# EAGLE board board_slave_3_LVDT (EAGLE 9.6.2)
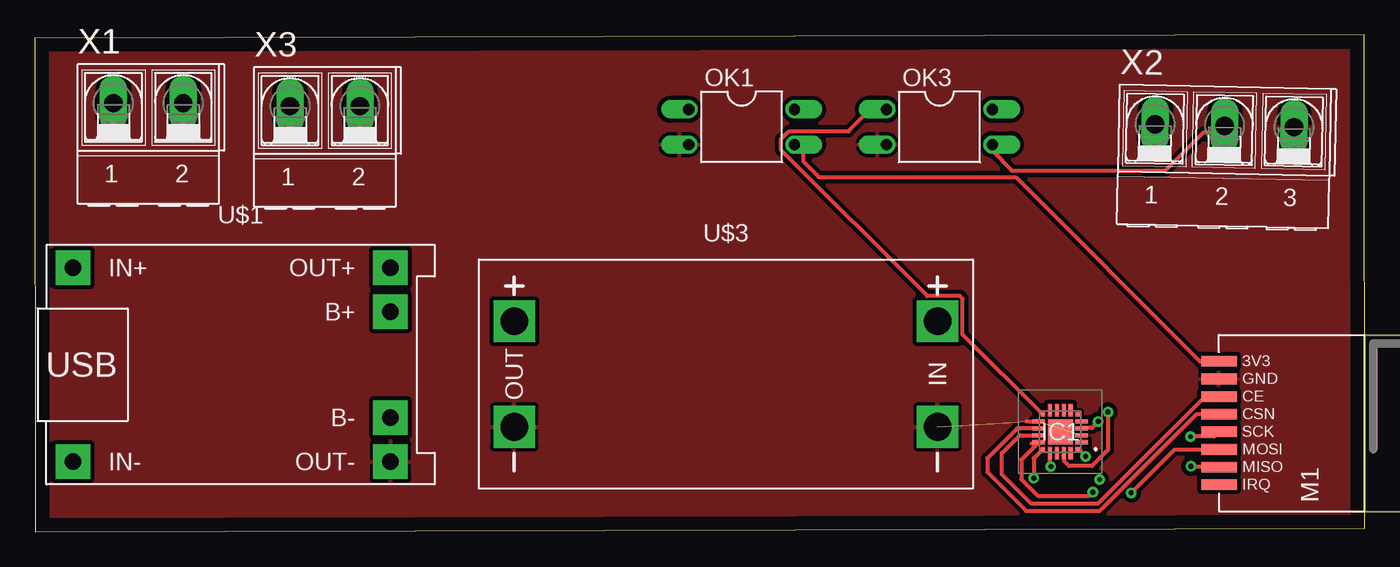
[diagram p0: board, top side]
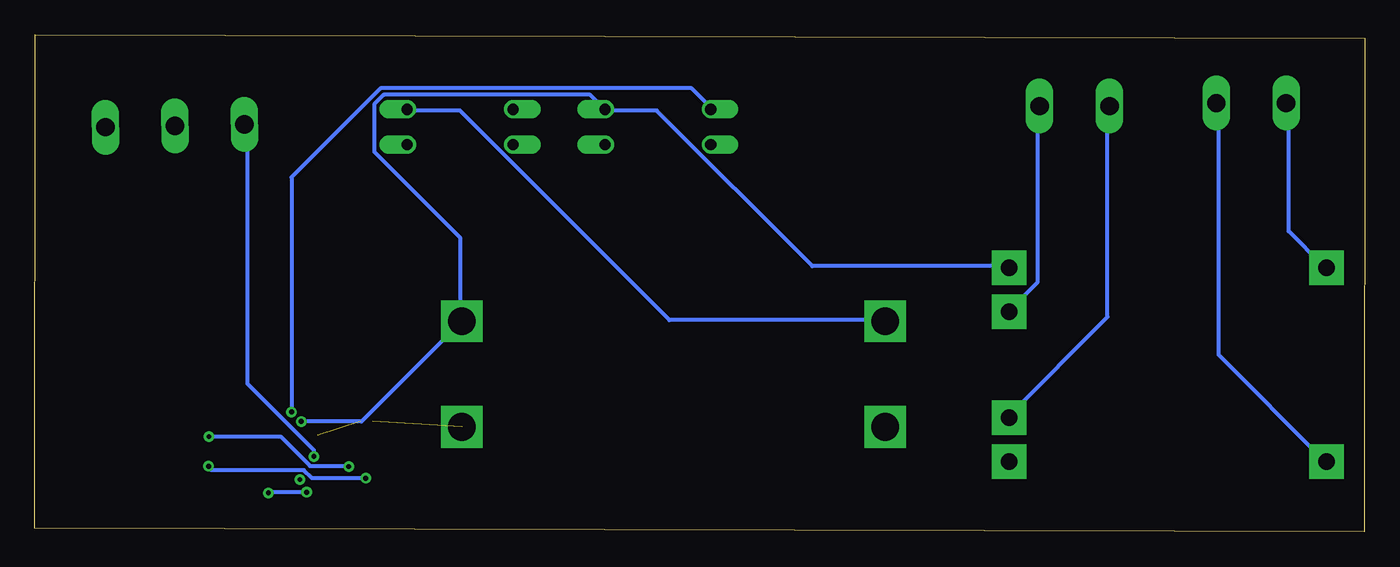
[diagram p1: board, bottom side, seen from below]

Size 95.77 x 35.82 mm. Coordinates in mm from the lower left corner, seen from the top.
Outline: 0.03,0 95.77,0.27 95.73,35.82 0,35.55 0.03,0
Copper layers (1*16): Top 0.035mm / dielectric 1.5mm / Bottom 0.035mm
Design rules "default": minimum track width 6mil, minimum drill 0.35mm, track to track 6mil, track to pad 6mil, pad to pad 6mil, via to via 6mil, smd to smd 6mil, copper to edge 40mil, drill to drill 6mil, minimum pad ring 10mil, minimum via ring 8mil, stop-mask expansion 4mil, vias tented up to drill 0mil, thermal gap 10mil
Net classes: 0 default: width 0.305 mm

## Footprints (pad centres in the part's own frame; a part is rotated, then mirrored left to right if it is on the bottom)
EFM8BB10F2GAQFN20R = smd 0.3 x 0.3: 1 -1.25,1.25; 6 -1.25,-1.25; 11 1.25,-1.25; 16 1.25,1.25 | smd 0.9 x 0.3: 2 -1.55,0.75; 3 -1.55,0.25; 4 -1.55,-0.25; 5 -1.55,-0.75; 12 1.55,-0.75; 13 1.55,-0.25; 14 1.55,0.25; 15 1.55,0.75 | smd 0.3 x 0.9: 7 -0.75,-1.55; 8 -0.25,-1.55; 9 0.25,-1.55; 10 0.75,-1.55; 17 0.75,1.55; 18 0.25,1.55; 19 -0.25,1.55; 20 -0.75,1.55 | smd 1.8 x 1.8: 21 0,0
WIRELESS-NRF24L01-SMD = smd 2.54 x 0.762: 1 1.27,0; 2 1.27,1.27; 3 1.27,2.54; 4 1.27,3.81; 5 1.27,5.08; 6 1.27,6.35; 7 1.27,7.62; 8 1.27,8.89
DIL04 = drill 0.813 offset: 1 -1.27,-3.81; 2 1.27,-3.81; 3 1.27,3.81; 4 -1.27,3.81
BATTERY-CHARGER-LI-PROT = drill 1.2 pad 2.5 square: B+ 10.795,3.81; B- 10.795,-3.81; IN+ -12.065,6.985; IN- -12.065,-6.985; OUT+ 10.795,6.985; OUT- 10.795,-6.985
DC-DC-STEP-UP-MT3608 = drill 2 pad 2.8 square: IN+ 15.24,3.81; IN- 15.24,-3.81; OUT+ -15.24,3.81; OUT- -15.24,-3.81
AK500/2-H = drill 1.321 long: 1 -2.515,0; 2 2.515,0
AK500/3-H = drill 1.321 long: 1 -5.004,0; 2 0,0; 3 5.004,0

## Placement (x,y rotation side)
IC1  EFM8BB10F2G-A-QFN20R  [EFM8BB10F2GAQFN20R]  73.84,7.22 180 top
M1  WIRELESS-NRF24L01SMD  [WIRELESS-NRF24L01-SMD]  84,3.41 0 top
OK1  PC817  [DIL04]  50.9,29.18 270 top
OK3  PC817  [DIL04]  65.14,29.17 270 top
U$1  BATTERY-CHARGER-LI-PROT  [BATTERY-CHARGER-LI-PROT]  14.81,12.05 0 top
U$3  DC-DC-STEP-UP-MT3608  [DC-DC-STEP-UP-MT3608]  49.77,11.37 0 top
X1  [AK500/2-H]  8.18,30.89 0 top
X2  [AK500/3-H]  85.67,29.26 358.8 top
X3  [AK500/2-H]  20.9,30.67 0 top

## Library data of the parts
IC1 = SamacSys_Parts; DESCRIPTION: 8-bit Microcontrollers - MCU 8051 25 MHz 2 kB fla sh 0.25 kB RAM 8-bi; HEIGHT: 0.8mm; MANUFACTURER_NAME: Silicon Labs; MANUFACTURER_PART_NUMBER: EFM8BB10F2G-A-QFN20R; MOUSER_PART_NUMBER: 634-8BB10F2GAQF20R; MOUSER_PRICE-STOCK: https://www.mouser.co.uk/ProductDetail/Silicon-Labs/EFM8BB10F2G-A-QFN20R?qs=DCjbIwhU0ZtADu%252B55HsWtA%3D%3D
M1 = nrf24l01plus
OK1 OK3 = optocoupler; MPN: PC817X4J000F; OC_FARNELL: 9707727; OC_NEWARK: 97K7059
U$1 U$3 = diy-modules_1
X1-X3 = con-ptr500; OC_FARNELL: unknown; OC_NEWARK: unknown

## Nets
GND: IC1.3 IC1.12 M1.7 OK1.2 OK3.2 U$1.OUT- U$3.IN- U$3.OUT- X2.3
IN+: U$1.IN+ X1.1
IN-: U$1.IN- X1.2
N$1: IC1.11 OK3.1
N$2: IC1.1 X2.1
N$3: IC1.17 M1.4
N$4: IC1.16 M1.2
N$5: IC1.15 M1.3
N$6: IC1.14 M1.6
N$7: IC1.13 M1.5
N$8: IC1.19 OK1.1
N$9: OK3.3 X2.2
N$10: U$1.B- X3.1
N$11: U$1.B+ X3.2
N$12: OK3.4 U$3.OUT+
VCC: IC1.4 OK1.4 U$1.OUT+ U$3.IN+
VIN_NRF: M1.8 OK1.3

## Tracks (layer width: path | path; a pad name or v marks a point on that pad's centre or on a via)
GND  (2 unrouted)
  Top 0.305: IC1.12 72.24,7.95 71.55,7.95 71.43,7.97
  pour Top (isolate 0.305): 0.39,35.03 95.43,35.03 95.43,0.87 0.39,0.87
IN+
  Bottom 0.305: X1.1 5.49,30.81 5.49,21.67 2.97,19.15 U$1.IN+
IN-
  Bottom 0.305: X1.2 10.52,30.81 10.52,12.75 2.97,5.21 U$1.IN-
N$1
  Top 0.305: IC1.11 66.81,14.24 66.81,16.81 66.63,16.99 64.26,16.99 53.74,27.51 53.74,28.31 54.31,28.87 58.59,28.87 60.16,30.44 OK3.1
N$2  (via drill 0.35)
  Top 0.305: v75.67,5.44 75.21,5.89 IC1.1
  Bottom 0.305: v75.67,5.44 75.67,5.89 80.47,10.7 80.47,29.21 X2.1
N$3  (via drill 0.35)
  Top 0.305: M1.4 84.92,6.87 v83.23,6.87 | v73.16,4.71 73.09,4.78 IC1.17
  Bottom 0.305: v83.23,6.87 78.06,6.87 75.95,4.75 73.21,4.75 v73.16,4.71
N$4  (via drill 0.35)
  Top 0.305: 72.47,5.89 IC1.16 71.93,5.31 v71.93,3.87 | 85.27,4.75 85.27,4.71 | 85.27,4.71 M1.2 | v83.25,4.73 84.53,4.73 84.53,4.74 85.24,4.74 85.27,4.71
  Bottom 0.305: v71.93,3.87 75.81,3.87 76.39,4.45 83.03,4.45 83.28,4.71 | 83.28,4.71 | 83.28,4.71 v83.25,4.73
N$5  (via drill 0.35)
  Top 0.305: 71.78,6.35 72.24,6.35 IC1.15 71.03,5.21 71.03,3.8 72.24,2.59 75.92,2.59 v76.19,2.86 | 85.27,5.89 M1.3 82.08,5.95 v78.94,2.8
  Bottom 0.305: v76.19,2.86 78.68,2.86 78.75,2.8 v78.94,2.8
N$6
  Top 0.305: M1.6 84.28,9.76 76.55,2.03 71.76,2.03 69.63,4.15 69.63,5.66 70.94,6.97 IC1.14
N$7
  Top 0.305: IC1.13 72.19,7.47 72.17,7.46 72.17,7.47 70.74,7.47 68.59,5.32 68.59,4.33 71.4,1.51 76.69,1.51 83.66,8.49 M1.5
N$8  (via drill 0.35)
  Top 0.305: v77.27,8.64 77.27,5.89 76.13,4.75 74.47,4.75 74.13,5.09 74.13,5.37 74.07,5.44 IC1.19
  Bottom 0.305: v77.27,8.64 77.27,25.55 70.87,31.96 48.46,31.96 47.09,30.58 OK1.1
N$9
  Top 0.305: OK3.3 69.04,27.84 69.04,27.38 70.41,26.01 81.38,26.01 84.13,28.75 85.04,28.75 85.5,29.21 X2.2
N$10
  Bottom 0.305: X3.1 18.52,30.58 18.52,15.5 25.6,8.41 U$1.B-
N$11
  Bottom 0.305: X3.2 23.55,30.58 23.55,18.01 25.6,15.95 U$1.B+
N$12
  Bottom 0.305: OK3.4 68.81,30.35 65.15,30.35 50.07,15.27 34.75,15.27 U$3.OUT+
N$14  (via drill 0.35)
  other vias: 76.67,3.77
VCC  (via drill 0.35)
  Top 0.305: v76.58,7.95 76.13,7.49 75.44,7.49 IC1.4
  Bottom 0.305: v76.58,7.95 72.24,7.95 65.15,15.04 U$3.IN+ 65.15,15.27 65.15,21.21 71.32,27.38 71.32,30.81 70.64,31.5 55.78,31.5 54.87,30.58 OK1.4 54.64,30.35 50.98,30.35 39.78,19.15 25.83,19.15 U$1.OUT+
VIN_NRF
  Top 0.305: M1.8 83.9,12.3 70.64,25.55 56.47,25.55 55.32,26.7 55.32,27.38 54.87,27.84 OK1.3